# EAGLE board SparkFun_RedStick_Panel_v10 (EAGLE 7.5.0), part 1 of 8
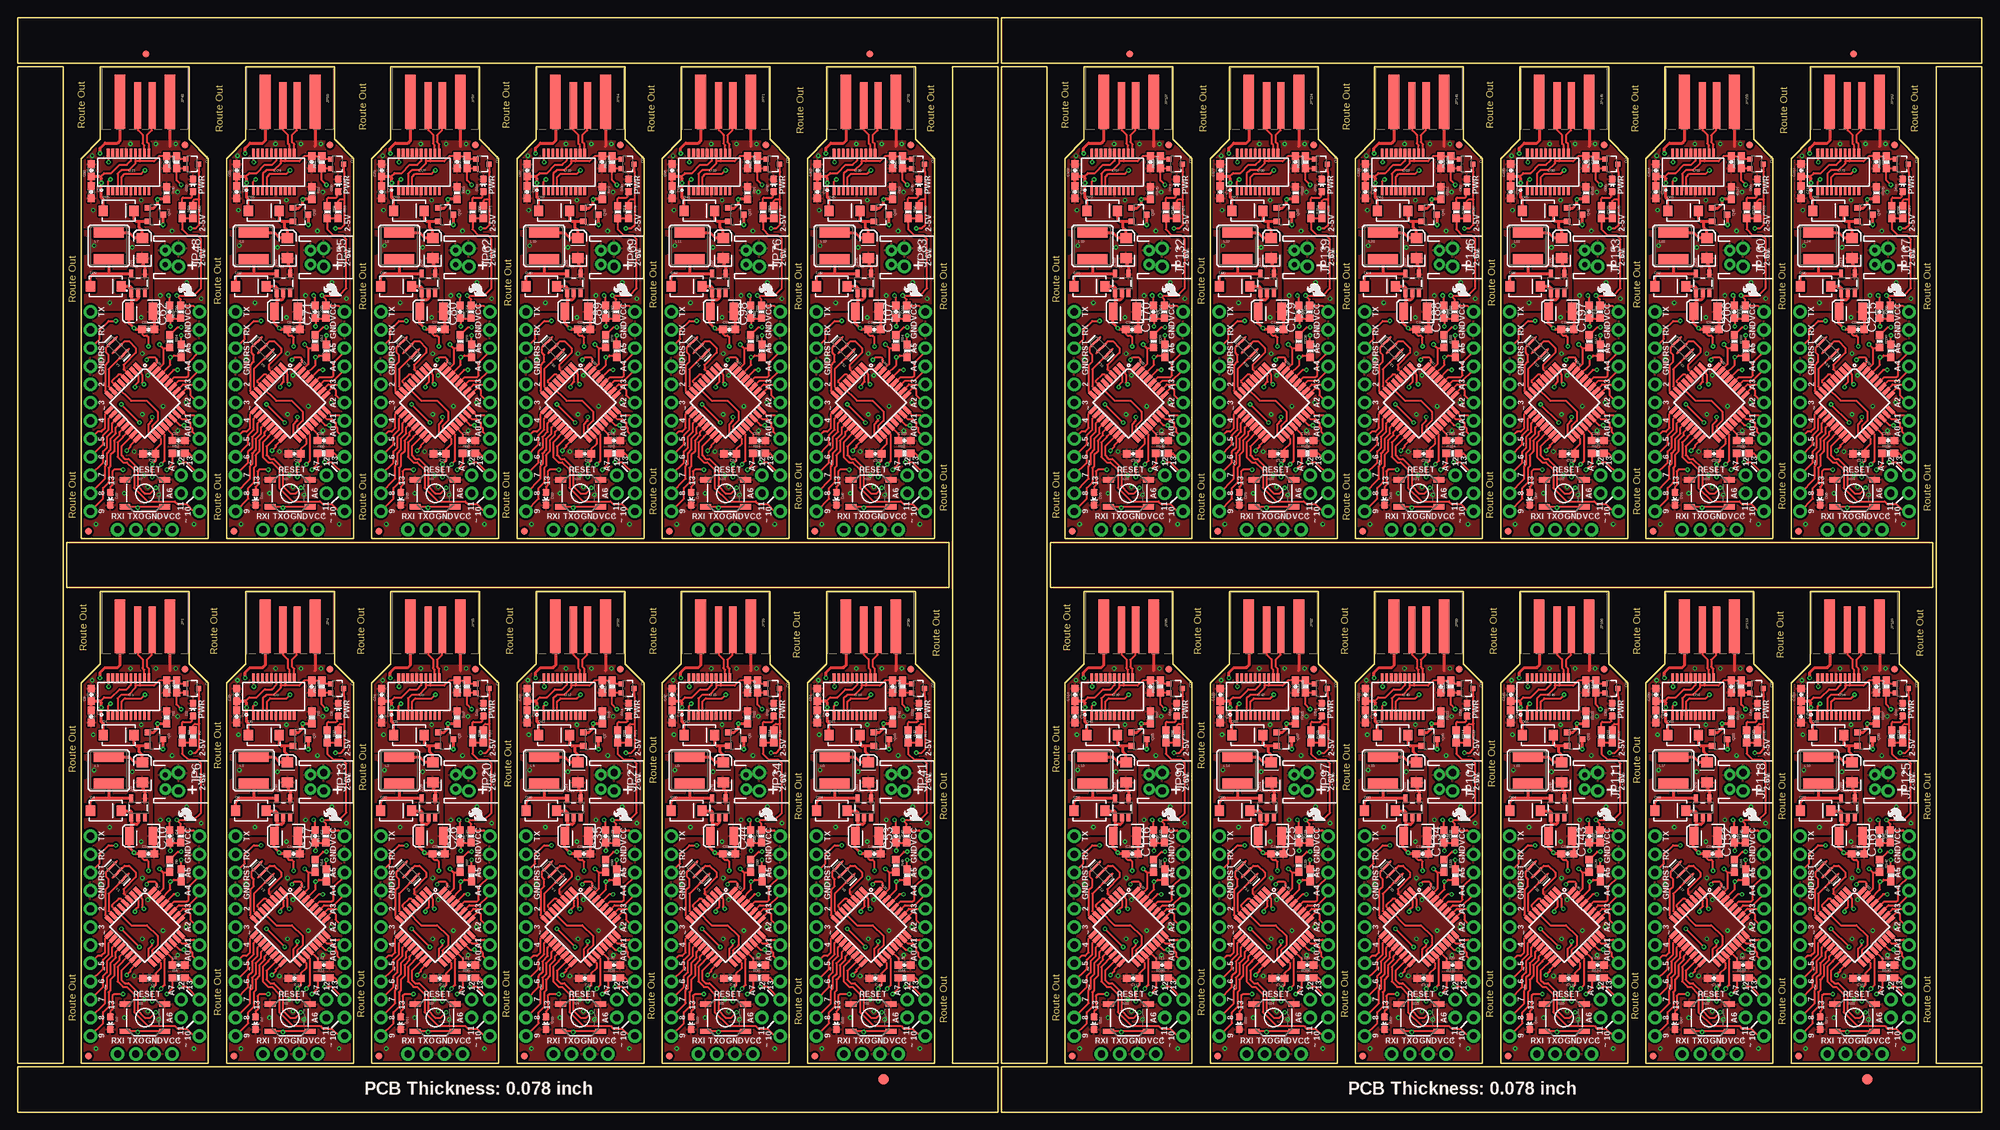
[diagram p0: board, top side]
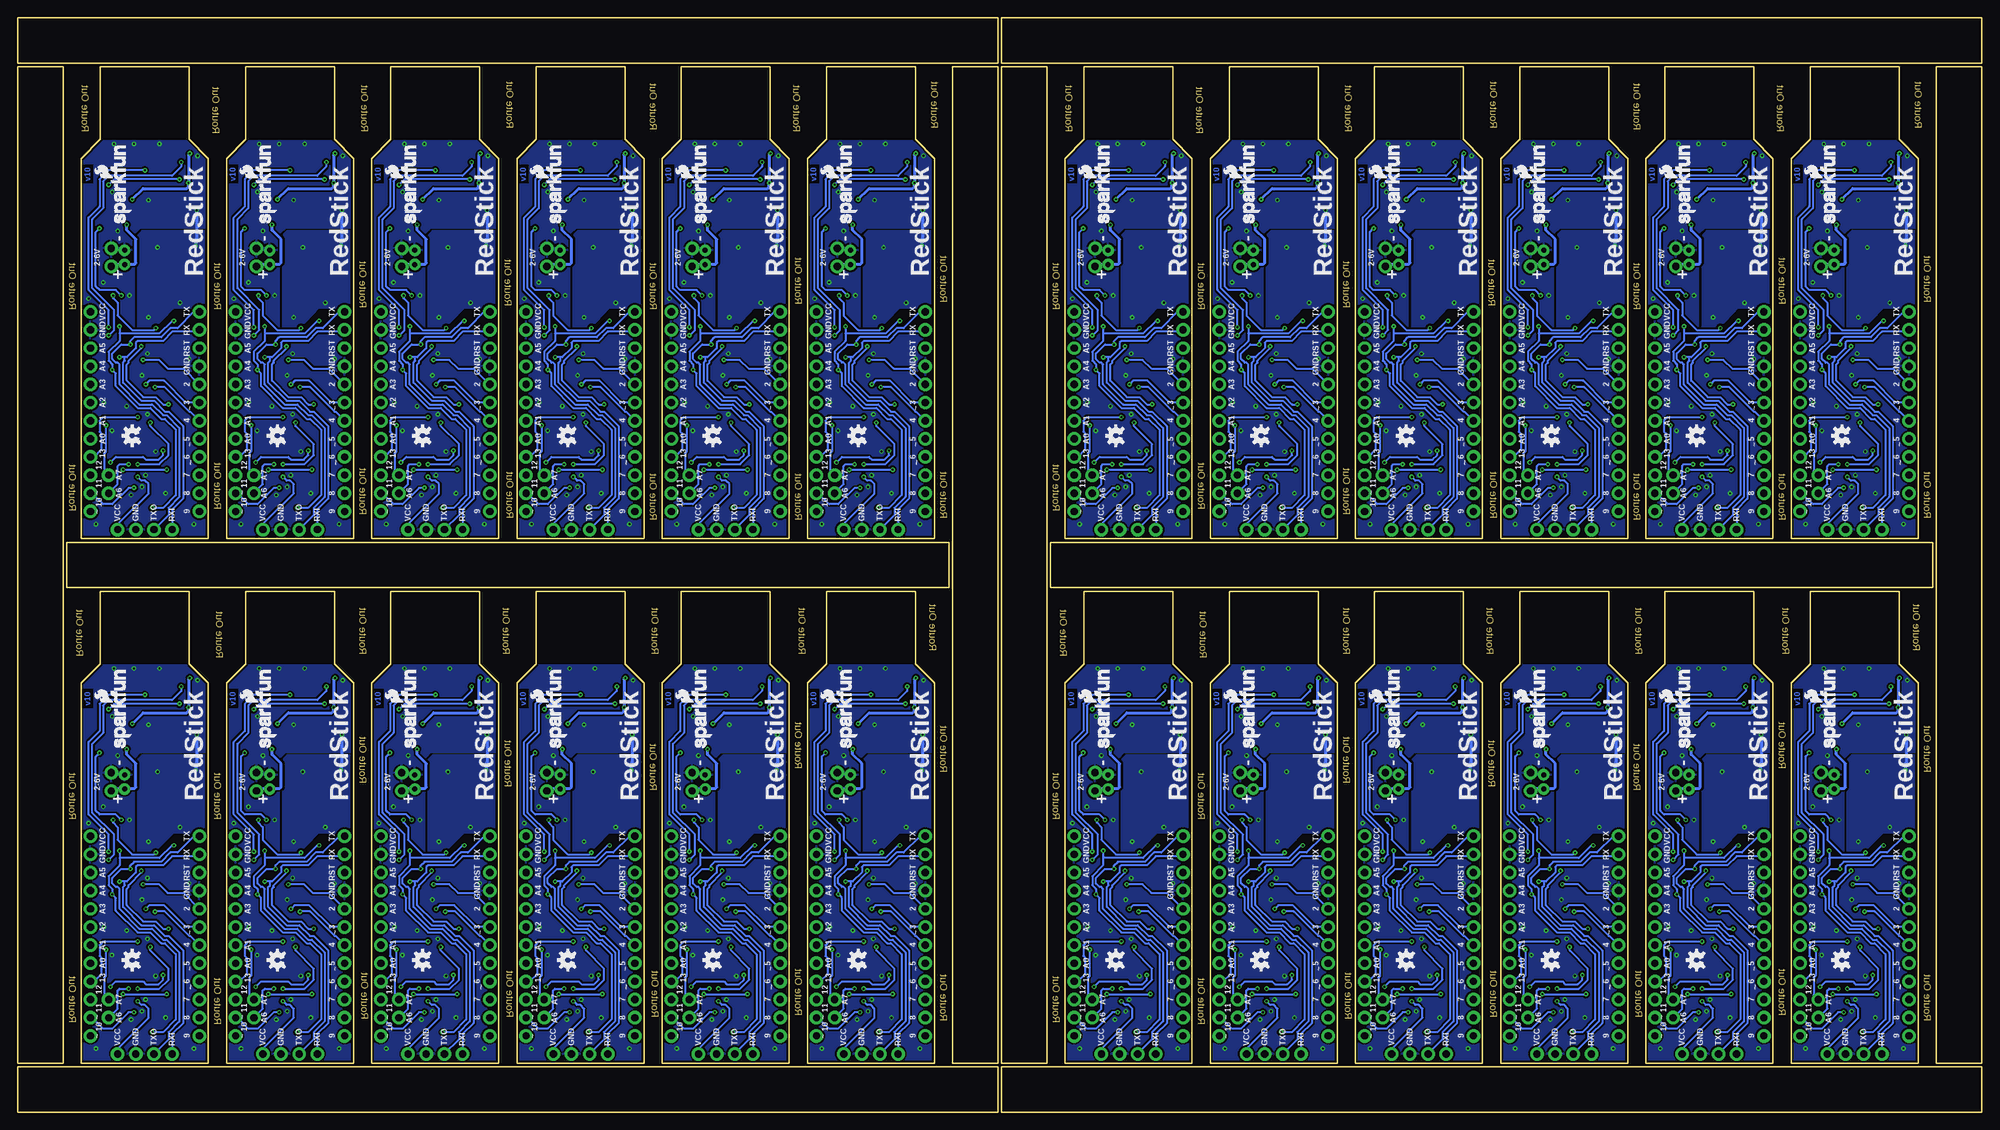
[diagram p1: board, bottom side, seen from below]

Size 274.83 x 153.16 mm. Coordinates in mm from the lower left corner, seen from the top.
Outline: 6.35,79.25 6.35,6.86 0,6.86 0,29.72
Outline: 0,27.18 0,146.3 6.35,146.3 6.35,76.71
Outline: 81.28,0 0,0 0,6.35 31.75,6.35
Outline: 29.21,6.35 137.16,6.35 137.16,0 78.74,0
Outline: 137.16,79.25 137.16,6.86 130.81,6.86 130.81,29.72
Outline: 130.81,27.18 130.81,146.3 137.16,146.3 137.16,76.71
Outline: 55.88,79.76 130.3,79.76 130.3,73.41 105.41,73.41
Outline: 107.95,73.41 6.86,73.41 6.86,79.76 58.42,79.76
Outline: 53.34,153.16 137.16,153.16 137.16,146.81 102.87,146.81
Outline: 105.41,146.81 0,146.81 0,153.16 55.88,153.16
Outline: 144.02,79.25 144.02,6.86 137.67,6.86 137.67,29.72
Outline: 137.67,27.18 137.67,146.3 144.02,146.3 144.02,76.71
Outline: 218.95,0 137.67,0 137.67,6.35 169.42,6.35
Outline: 166.88,6.35 274.83,6.35 274.83,0 216.41,0
Outline: 274.83,79.25 274.83,6.86 268.48,6.86 268.48,29.72
Outline: 268.48,27.18 268.48,146.3 274.83,146.3 274.83,76.71
Outline: 193.55,79.76 267.97,79.76 267.97,73.41 243.08,73.41
Outline: 245.62,73.41 144.53,73.41 144.53,79.76 196.09,79.76
Outline: 191.01,153.16 274.83,153.16 274.83,146.81 240.54,146.81
Outline: 243.08,146.81 137.67,146.81 137.67,153.16 193.55,153.16
Outline: 8.89,6.86 26.67,6.86 26.67,60.07 24,62.74 24,72.9 11.56,72.9 11.56,62.74 8.89,60.07 8.89,6.86
Outline: 29.21,6.86 46.99,6.86 46.99,60.07 44.32,62.74 44.32,72.9 31.88,72.9 31.88,62.74 29.21,60.07 29.21,6.86
Outline: 49.53,6.86 67.31,6.86 67.31,60.07 64.64,62.74 64.64,72.9 52.2,72.9 52.2,62.74 49.53,60.07 49.53,6.86
Outline: 69.85,6.86 87.63,6.86 87.63,60.07 84.96,62.74 84.96,72.9 72.52,72.9 72.52,62.74 69.85,60.07 69.85,6.86
Outline: 90.17,6.86 107.95,6.86 107.95,60.07 105.28,62.74 105.28,72.9 92.84,72.9 92.84,62.74 90.17,60.07 90.17,6.86
Outline: 110.49,6.86 128.27,6.86 128.27,60.07 125.6,62.74 125.6,72.9 113.16,72.9 113.16,62.74 110.49,60.07 110.49,6.86
Outline: 8.89,80.26 26.67,80.26 26.67,133.48 24,136.14 24,146.3 11.56,146.3 11.56,136.14 8.89,133.48 8.89,80.26
Outline: 29.21,80.26 46.99,80.26 46.99,133.48 44.32,136.14 44.32,146.3 31.88,146.3 31.88,136.14 29.21,133.48 29.21,80.26
Outline: 49.53,80.26 67.31,80.26 67.31,133.48 64.64,136.14 64.64,146.3 52.2,146.3 52.2,136.14 49.53,133.48 49.53,80.26
Outline: 69.85,80.26 87.63,80.26 87.63,133.48 84.96,136.14 84.96,146.3 72.52,146.3 72.52,136.14 69.85,133.48 69.85,80.26
Outline: 90.17,80.26 107.95,80.26 107.95,133.48 105.28,136.14 105.28,146.3 92.84,146.3 92.84,136.14 90.17,133.48 90.17,80.26
Outline: 110.49,80.26 128.27,80.26 128.27,133.48 125.6,136.14 125.6,146.3 113.16,146.3 113.16,136.14 110.49,133.48 110.49,80.26
Outline: 146.56,6.86 164.34,6.86 164.34,60.07 161.67,62.74 161.67,72.9 149.22,72.9 149.22,62.74 146.56,60.07 146.56,6.86
Outline: 166.88,6.86 184.66,6.86 184.66,60.07 181.99,62.74 181.99,72.9 169.54,72.9 169.54,62.74 166.88,60.07 166.88,6.86
Outline: 187.2,6.86 204.98,6.86 204.98,60.07 202.31,62.74 202.31,72.9 189.87,72.9 189.87,62.74 187.2,60.07 187.2,6.86
Outline: 207.52,6.86 225.3,6.86 225.3,60.07 222.63,62.74 222.63,72.9 210.19,72.9 210.19,62.74 207.52,60.07 207.52,6.86
Outline: 227.84,6.86 245.62,6.86 245.62,60.07 242.95,62.74 242.95,72.9 230.5,72.9 230.5,62.74 227.84,60.07 227.84,6.86
Outline: 248.16,6.86 265.94,6.86 265.94,60.07 263.27,62.74 263.27,72.9 250.82,72.9 250.82,62.74 248.16,60.07 248.16,6.86
Outline: 146.56,80.26 164.34,80.26 164.34,133.48 161.67,136.14 161.67,146.3 149.22,146.3 149.22,136.14 146.56,133.48 146.56,80.26
Outline: 166.88,80.26 184.66,80.26 184.66,133.48 181.99,136.14 181.99,146.3 169.54,146.3 169.54,136.14 166.88,133.48 166.88,80.26
Outline: 187.2,80.26 204.98,80.26 204.98,133.48 202.31,136.14 202.31,146.3 189.87,146.3 189.87,136.14 187.2,133.48 187.2,80.26
Outline: 207.52,80.26 225.3,80.26 225.3,133.48 222.63,136.14 222.63,146.3 210.19,146.3 210.19,136.14 207.52,133.48 207.52,80.26
Outline: 227.84,80.26 245.62,80.26 245.62,133.48 242.95,136.14 242.95,146.3 230.5,146.3 230.5,136.14 227.84,133.48 227.84,80.26
Outline: 248.16,80.26 265.94,80.26 265.94,133.48 263.27,136.14 263.27,146.3 250.82,146.3 250.82,136.14 248.16,133.48 248.16,80.26
Copper layers (1*16): Top 0.035mm / dielectric 1.5mm / Bottom 0.035mm
Design rules "SparkFun-2-layer-TIGHT": minimum track width 7mil, minimum drill 15mil, track to track 7mil, track to pad 7mil, pad to pad 7mil, via to via 7mil, smd to smd 7mil, copper to edge 7mil, drill to drill 7mil, minimum pad ring 7mil, minimum via ring 7mil, stop-mask expansion 4mil, vias tented up to drill 20mil, thermal gap 10mil
tRestrict: 144 lines

## Footprints (pad centres in the part's own frame; a part is rotated, then mirrored left to right if it is on the bottom)
0603-CAP = smd 1.1 x 1: 1 -0.85,0; 2 0.85,0
EIA3216 = smd 1.4 x 1.6: A 1.4,0; C -1.4,0
EIA3528 = smd 1.2 x 2.5: A 1.65,0; C -1.65,0
SMA-DIODE = smd 1.27 x 1.47: A -2.15,0; C 2.15,0
LED-0603 = smd 1 x 1: A 0,-0.877; C 0,0.877
FIDUCIAL-1.5X3 = smd 1.5 x 1.5: 1 0,0
FIDUCIAL-1X2 = smd 1 x 1: 1 0,0
USB-A-PCB-NOPASTE = smd 7.5 x 1.5: 5V -0.2,-3.5; GND -0.2,3.5 | smd 6.5 x 1: USB_M 0.3,-1; USB_P 0.3,1
1X12_NO_SILK = drill 1.016 pad 1.88: 1 0,0; 2 2.54,0; 3 5.08,0; 4 7.62,0; 5 10.16,0; 6 12.7,0; 7 15.24,0; 8 17.78,0; 9 20.32,0; 10 22.86,0; 11 25.4,0; 12 27.94,0
1X02_NO_SILK = drill 1.016 pad 1.88: 1 0,0; 2 2.54,0
JST-2-PTH = drill 0.7 pad 1.6: 1 -1,0; 2 1,0
1X04_NO_SILK_ALL_ROUND = drill 1.016 pad 1.88: 1 0,0; 2 2.54,0; 3 5.08,0; 4 7.62,0
CR54 = smd 4.2 x 1.4: P$1 0,1.85; P$2 0,-1.85
SOT23-3 = smd 0.8 x 0.9: 1 -0.95,-1; 2 0.95,-1; 3 0,1.1
SOT323 = smd 0.7 x 0.7: 1 -0.65,-0.925; 2 0.65,-0.925; 3 0,0.925
0603-RES = smd 1.1 x 1: 1 -0.85,0; 2 0.85,0
TACTILE-SWITCH-SMD = smd 1.524 x 0.762: 1 -2.794,1.905; 2 2.794,1.905; 3 -2.794,-1.905; 4 2.794,-1.905
SSOP20_L = smd 0.381 x 1.143: 1 -2.857,-2.68; 2 -2.223,-2.68; 3 -1.587,-2.68; 4 -0.953,-2.68; 5 -0.318,-2.68; 6 0.318,-2.68; 7 0.953,-2.68; 8 1.587,-2.68; 9 2.223,-2.68; 10 2.857,-2.68; 11 2.857,2.68; 12 2.223,2.68; 13 1.587,2.68; 14 0.953,2.68; 15 0.318,2.68; 16 -0.318,2.68; 17 -0.953,2.68; 18 -1.587,2.68; 19 -2.223,2.68; 20 -2.857,2.68
TQFP32-08 = smd 1.27 x 0.559: 1 -4.293,2.8; 2 -4.293,2; 3 -4.293,1.2; 4 -4.293,0.4; 5 -4.293,-0.4; 6 -4.293,-1.2; 7 -4.293,-2; 8 -4.293,-2.8; 17 4.293,-2.8; 18 4.293,-2; 19 4.293,-1.2; 20 4.293,-0.4; 21 4.293,0.4; 22 4.293,1.2; 23 4.293,2; 24 4.293,2.8 | smd 0.559 x 1.27: 9 -2.8,-4.293; 10 -2,-4.293; 11 -1.2,-4.293; 12 -0.4,-4.293; 13 0.4,-4.293; 14 1.2,-4.293; 15 2,-4.293; 16 2.8,-4.293; 25 2.8,4.293; 26 2,4.293; 27 1.2,4.293; 28 0.4,4.293; 29 -0.4,4.293; 30 -1.2,4.293; 31 -2,4.293; 32 -2.8,4.293
SOT23-5 = smd 0.55 x 1.2: 1 -0.95,-1.3; 2 0,-1.3; 3 0.95,-1.3; 4 0.95,1.3; 5 -0.95,1.3
RESONATOR-SMD = smd 0.45 x 1.905: 1 -1.2,0; 2 0,0; 3 1.2,0